# Altium PCB 智能家居-窗帘-电力板.PcbDoc
Units mm, origin at the board's own origin, x right, y up, seen from the top; angles counter-clockwise.
Board outline 65 x 65 mm, 2 copper layers (Top Layer, Bottom Layer); 22 components, 15 nets, 62 pads, 0 vias.
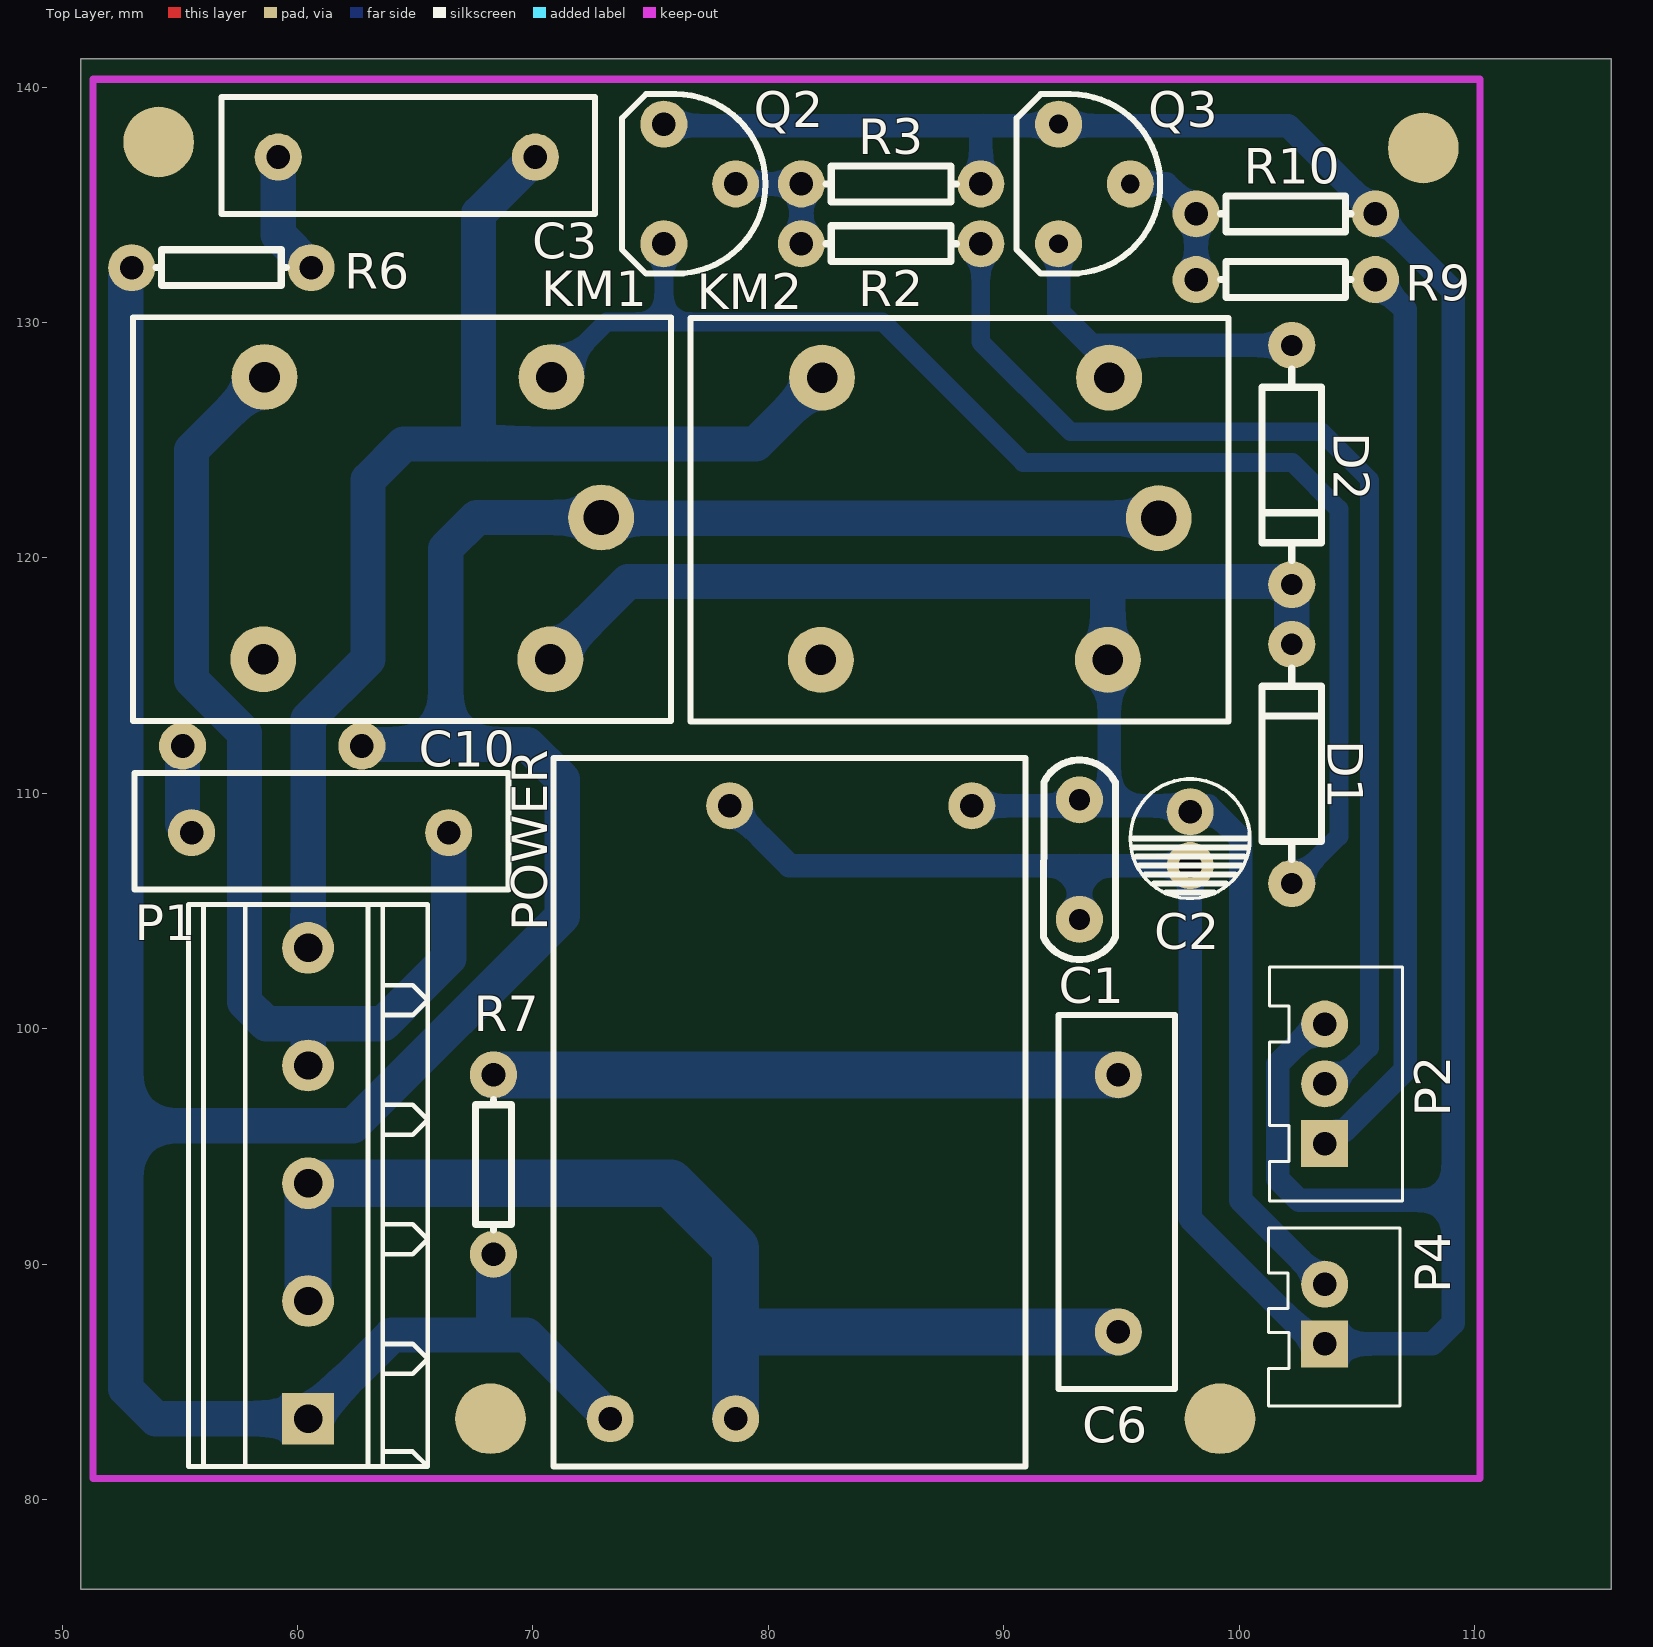
[diagram p0: Top Layer view]
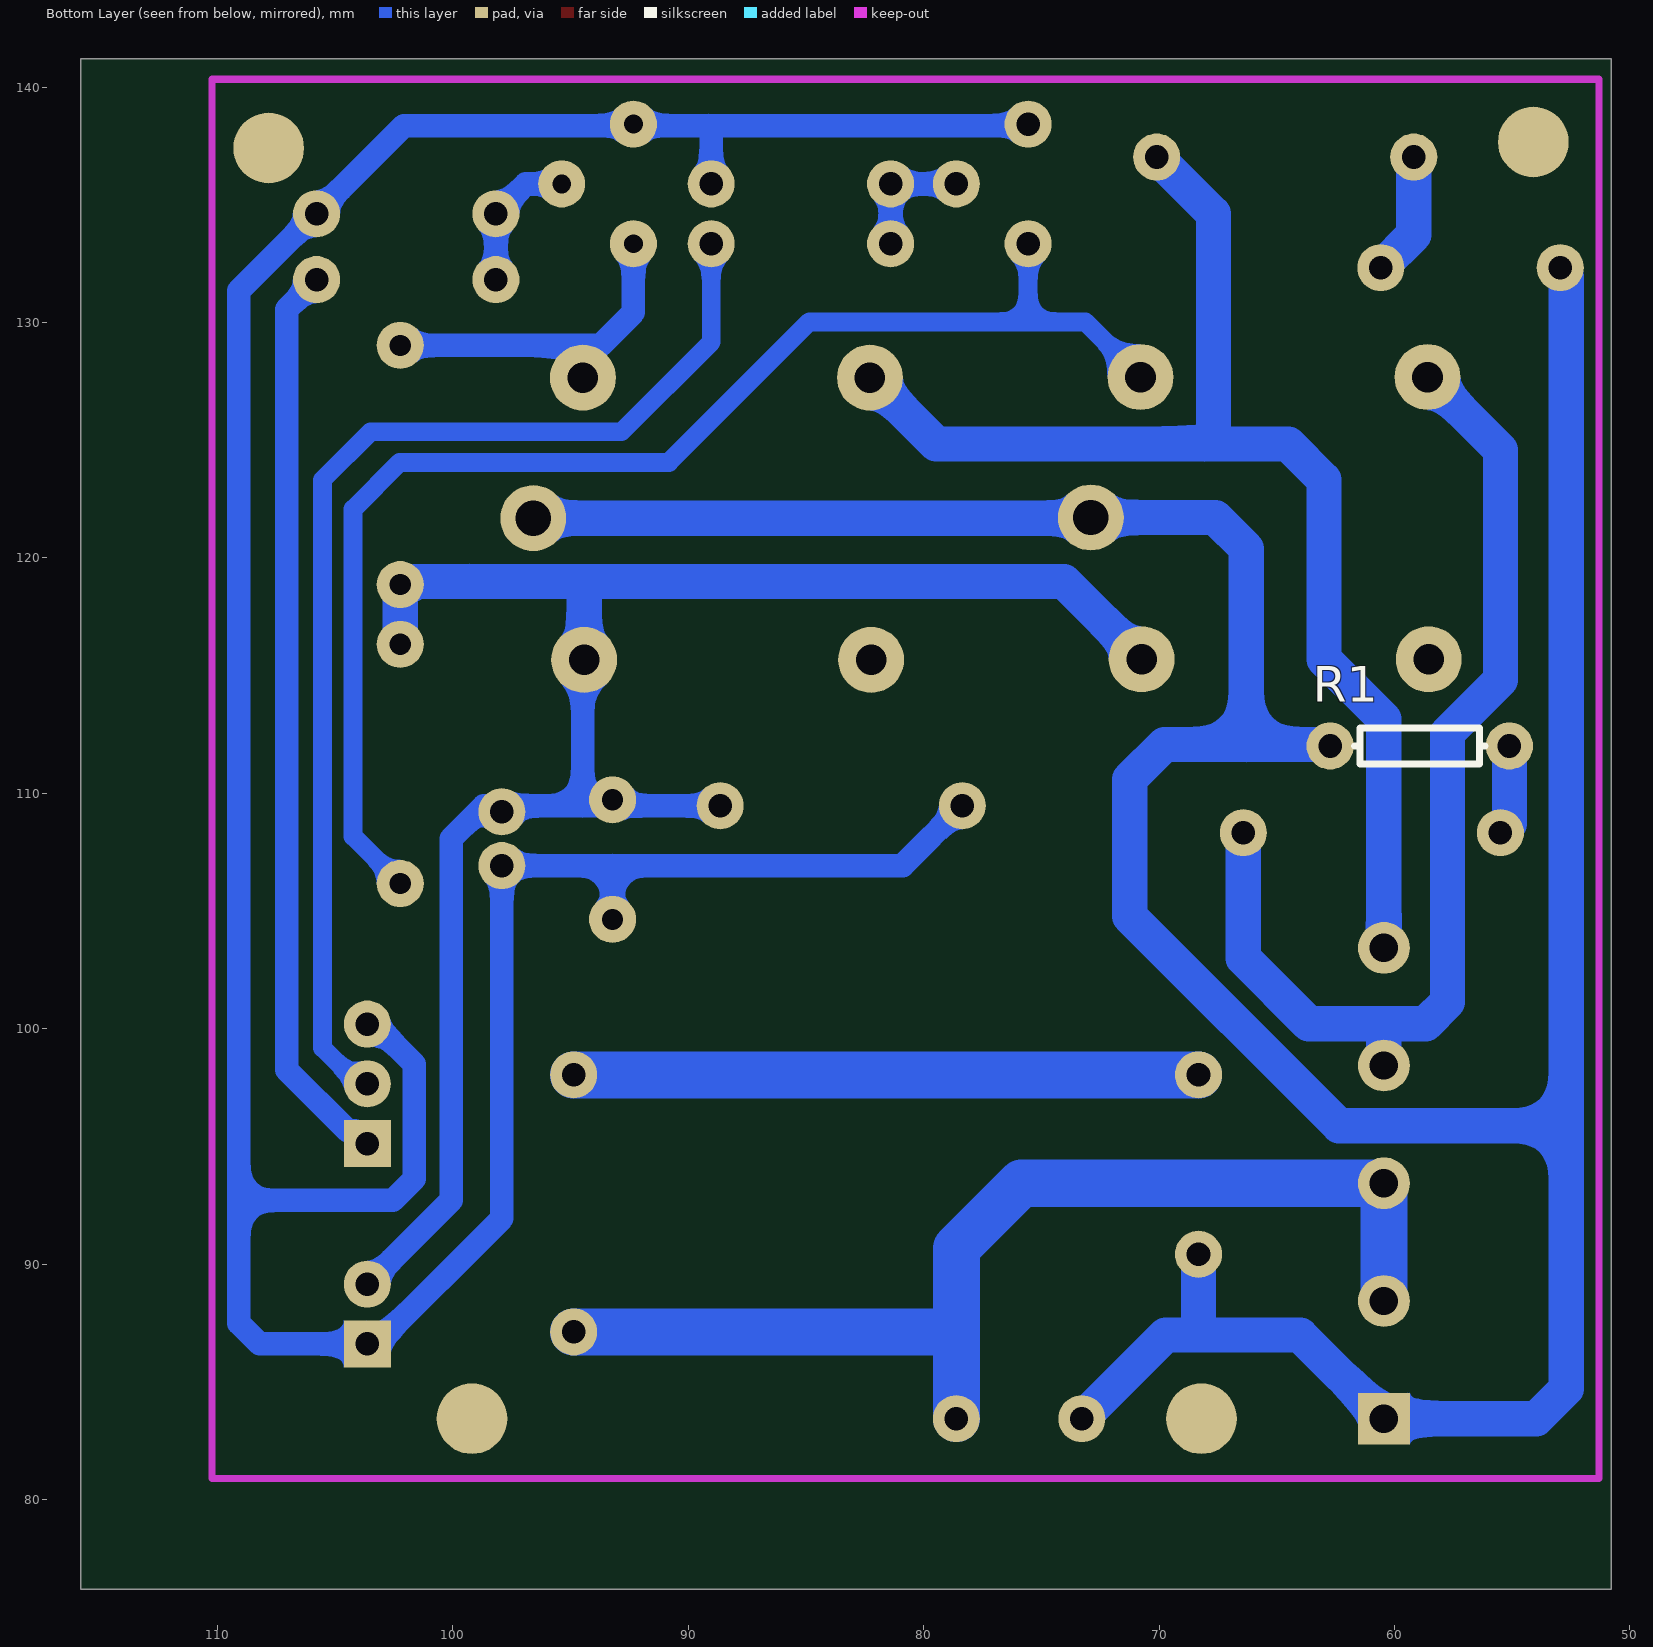
[diagram p1: Bottom Layer view, seen from below]

## Layer stack, top to bottom
Top Solder: solder mask 0.0102, Solder Resist, Dk 3.5
Top Layer: signal copper 0.0356
Dielectric 1: dielectric 0.32, FR-4, Dk 4.8
Bottom Layer: signal copper 0.0356
Bottom Solder: solder mask 0.0102, Solder Resist, Dk 3.5

## Board outline
50.8,76.2 115.8,76.2 115.8,141.2 50.8,141.2

## Design rules (kind name [scope] priority, off if disabled: settings)
Clearance [All] p1: gap=0.5 ignorepadtopadclearanceinfootprint=FALSE except(0: Arc-Hole Track-Hole SMDPad-Hole THPad-Hole Via-Hole Fill-Hole Poly-Hole Region-Hole Text-Hole)
PolygonConnect [All] p1: connectstyle=Relief reliefconductorwidth=0.254 reliefentries=4 polygonreliefangle="90 Angle" airgapwidth=0.254
RoutingVias [All] p1: holewidth=1 width=2 viastyle="Through Hole" minholewidth=0.711 minwidth=1.27 maxholewidth=0.711 maxwidth=1.27
SolderMaskExpansion [All] p1: expansion=0.102
Width [All] p1: maxlimit=5 minlimit=0.5 preferedwidth=0.5 minimp=50.000000 maximp=50.000000 favimp=50.000000
30 further rules are at their usual default settings.

## Components (designator, comment, footprint, x,y, rotation, side; value= is the part's Value field where it differs from the comment)
C1 "0.01uF" 0.1UF 93.218,107.188 r270 top
C2 "Cap Pol1" CD5 97.917,109.22 r0 top value=47uF
C3 "Cap" 0.1UF/275V 70.104,137.033 r180 top value=104
C6 "Cap" 0.1UF/275V 94.869,98.044 r270 top value=104
C10 "Cap" 0.1UF/275V 66.421,108.331 r180 top value=104
D1 "Diode" DIODE 102.235,106.172 r90 top
D2 "Diode" DIODE 102.235,129.032 r270 top
KM1 "12VDC" SRD_RELAY 65.722,121.691 r180 top
KM2 "12VDC" SRD_RELAY 89.408,121.666 r180 top
P1 "电源端口" JK128-500-5P 60.452,83.439 r180 top
P2 "Header 3" TJC3-3A 103.632,97.667 r270 top
P4 "控制板电源端口" TJC3-2A 103.632,86.614 r90 top
POWER "220/5开关电源" 220/5开关电源 73.279,83.439 r90 top
Q2 "8050" TO-92D#1 75.565,135.89 r270 top
Q3 "8050" TO-92D#2 92.329,135.89 r270 top
R1 "100" AXIAL0.3 58.928,112.014 r0 bottom value=1K
R2 "4.7K" AXIAL0.3 85.217,133.35 r180 top value=1K
R3 "4.7K" AXIAL0.3 85.217,135.89 r0 top value=1K
R6 "100" AXIAL0.3 56.769,132.334 r180 top value=1K
R7 "100" AXIAL0.3 68.326,94.234 r90 top value=1K
R9 "4.7K" AXIAL0.3 101.981,131.826 r180 top value=1K
R10 "4.7K" AXIAL0.3 101.981,134.62 r0 top value=1K

## Footprints (in the part's own frame and the unit in brackets; to place one, negate y for a bottom-side part, rotate by r counter-clockwise, add the part's x,y. Pads: shape width x height; smd on the part's side, far side on the other; paste and mask are expansions set on the pad)
0.1UF [mm]
  round 2 hole 0.9: 1(-2.54,0) 2(2.54,0)
  silkscreen extent -4.22,-1.52 4.25,1.53
0.1UF/275V [mm]
  round 2 hole 1: 1(0,0) 2(10.922,0)
  silkscreen extent -2.54,-2.54 13.33,2.41
220/5开关电源 [mm]
  round 2 hole 1: 1(0,0) 2(0,-5.334) 3(26.035,-5.08) 4(26.035,-15.367)
  silkscreen extent -2.03,-17.65 28.07,2.41
AXIAL0.3 [mm]
  round 2 hole 1: 1(-3.81,0) 2(3.81,0)
  silkscreen extent -2.77,-0.76 2.77,0.76
CD5 [mm]
  round 2 hole 1: 1(0,0) 2(0,-2.286)
  silkscreen extent -2.54,-3.68 2.54,1.39
DIODE [mm]
  round 2 hole 0.9: 1(0,0) 2(10.16,0)
  silkscreen extent 1.02,-1.27 9.14,1.27
JK128-500-5P [mm]
  rect 2.2x2.2 hole 1.2: 1(0,0)
  round 2.2 hole 1.2: 2(0,-5) 3(0,-10) 4(0,-15) 5(0,-20)
  silkscreen extent -5.08,-21.84 5.08,2.03
SRD_RELAY [mm]
  round 2.8 hole 1.3: 1(-5.017,5.994) 2(7.175,5.994) 3(7.125,-5.994) 4(-5.067,-5.994)
  round 2.8 hole 1.5: 5(-7.175,-0.025)
  silkscreen extent -10.15,-8.53 12.71,8.61
TJC3-2A [mm]
  rect 2x2 hole 1: 1(0,0)
  round 2 hole 1: 2(2.54,0)
  silkscreen extent -2.64,-3.2 4.93,2.39
TJC3-3A [mm]
  rect 2x2 hole 1: 1(2.544,0)
  round 2 hole 1: 2(0.004,0) 3(-2.536,0)
  silkscreen extent -4.97,-2.35 4.97,3.3
TO-92D#1 [mm]
  round 2 hole 1: 1(-2.54,0) 2(0,3.048) 3(2.54,0)
  silkscreen extent -3.81,-1.78 3.81,4.32
TO-92D#2 [mm]
  round 2 hole 0.8: 1(-2.54,0) 2(0,3.048) 3(2.54,0)
  silkscreen extent -3.81,-1.78 3.81,4.32

## Part data
C1: library part Cap, "Capacitor", LatestRevisionDate=17-Jul-2002, LatestRevisionNote="Re-released for DXP Platform.", PackageDescription="Radial Cap, Thru-Hole; 2 Leads; 0.3 in Pin Spacing", PackageReference=0.1UF, Published=8-Jun-2000, Publisher="Altium Limited"
C2: "Polarized Capacitor (Radial)", LatestRevisionDate=17-Jul-2002, LatestRevisionNote="Re-released for DXP Platform.", PackageDescription="Polarized Capacitor (Radial); 2 Leads", PackageReference=RB7.6-15, Published=8-Jun-2000, Publisher="Altium Limited"
C3 C6 C10: "Capacitor", LatestRevisionDate=17-Jul-2002, LatestRevisionNote="Re-released for DXP Platform.", PackageDescription="Radial Cap, Thru-Hole; 2 Leads; 0.3 in Pin Spacing", PackageReference=RAD-0.3, Published=8-Jun-2000, Publisher="Altium Limited"
D1 D2: "Default Diode", Code_JEDEC=DO-214-AB, LatestRevisionDate=17-Jul-2002, LatestRevisionNote="Re-released for DXP Platform.", PackageDescription="DO-214-AB/SMC; 2 C-Bend Leads; Body 7.9 x 5.9 mm, inc. leads (LxW)", PackageReference=SMC, PackageVersion=Sep-1996, Published=8-Jun-2000, Publisher="Altium Limited"
KM1 KM2: library part SRD-12VDC
P1: library part "Header 5", "Header, 5-Pin", LatestRevisionDate=17-Jul-2002, LatestRevisionNote="Re-released for DXP Platform.", Publisher="Altium Limited"
P2: "Header, 3-Pin", LatestRevisionDate=17-Jul-2002, LatestRevisionNote="Re-released for DXP Platform.", Publisher="Altium Limited"
P4: library part "Header 2", "Header, 2-Pin", LatestRevisionDate=17-Jul-2002, LatestRevisionNote="Re-released for DXP Platform.", Publisher="Altium Limited"
Q2 Q3: library part NPN, "NPN Bipolar Transistor", Code_JEDEC=TO-226-AA, LatestRevisionDate=17-Jul-2002, LatestRevisionNote="Re-released for DXP Platform.", PackageDescription="TO, Flat Index; 3 In-Line, Axial Leads; Body Dia. 4.8mm; Leads 0.55 x 0.51 mm (max)", PackageReference=TO-226-AA, Published=8-Jun-2000, Publisher="Altium Limited"
R1 R2 R3 R6 R7 R9 R10: library part Res1, "Resistor", Published=8-Jun-2000, Publisher="Altium Limited", Revision="July-2002: Re-released for DXP Platform."

## Free pads (board coordinates)
  round 3 all layers, no hole: 2(68.199,83.439) 3(54.102,137.668) 3(99.187,83.439) 3(107.823,137.414)

## Nets (pads, with @x,y where several pads share a name; then routed paths per layer and width w, separated by ;. In a path a pad name is that pad's centre, name@x,y a point inside that pad or via, vN(x,y) a via of type N, cw(c..) or ccw(c..) an arc to the next point about the centre after c; other vN are vias at no path point)
GND: C1.2 C2.2 P2.3 P4.1 POWER.3 Q2.1 Q3.1 R3.2 R10.2 | length 149.9
  Bottom Layer w1: Q2.1@75.565,138.37 89.154,138.37 ; POWER.3 80.899,106.934 93.218,106.934 ; R3.2 89.027,138.243 89.154,138.37 ; C1.2 93.218,106.934 ; P2.3 103.092,99.663 102.804,99.663 101.632,98.491 101.632,93.629 102.551,92.71 109.086,92.71 ; 89.154,138.37 102.075,138.37 109.086,131.359 109.086,92.71 ; 93.218,106.934 C2.2 97.917,91.948 103.251,86.614 P4.1 108.204,86.614 109.086,87.496 109.086,92.71
L: KM1.5 KM2.5 P1.1 POWER.1 R1.2 R6.2 R7.1 | length 150.8
  Bottom Layer w1.5: R6.2@52.708,131.953 52.708,95.885 ; R1.2@63.119,112.014 63.119,112.081 66.294,112.081 ; R7.1 68.326,87.249 68.072,86.995 ; POWER.1 69.723,86.995 68.072,86.995 ; KM2.5 72.923,121.691 KM1.5 67.615,121.717 66.294,120.396 66.294,112.081 ; 52.708,95.885 62.357,95.885 71.247,104.775 71.247,110.607 69.773,112.081 66.294,112.081 ; 52.708,95.885 52.708,84.706 53.975,83.439 P1.1 64.008,86.995 68.072,86.995
L_OUT1: C10.1 KM1.3 P1.4 | length 46.2
  Bottom Layer w1.5: KM1.3 55.499,124.587 55.499,114.815 57.749,112.565 57.749,101.142 58.674,100.217 60.706,100.217 ; P1.4 60.452,99.963 60.706,100.217 ; C10.1 66.421,102.997 63.641,100.217 60.706,100.217
L_OUT2: C3.1 KM2.3 P1.5 | length 55.4
  Bottom Layer w1.5: P1.5 60.452,113.157 62.992,115.697 62.992,123.317 64.516,124.841 68.072,124.841 ; C3.1 67.691,134.62 67.691,125.222 68.072,124.841 ; KM2.3 79.464,124.841 68.072,124.841
N: C6.2 P1.2 P1.3 POWER.2 | length 47.9
  Bottom Layer w2: P1.2 P1.3 75.852,93.439 78.613,90.678 78.613,86.868 ; POWER.2 78.613,86.868 ; C6.2 78.867,87.122 78.613,86.868
NetC3_2: C3.2 R6.1 | length 5.3
  Bottom Layer w1.5: C3.2 59.182,133.731 R6.1
NetC6_1: C6.1 R7.2 | length 26.5
  Bottom Layer w2: R7.2 C6.1
NetC10_2: C10.2 R1.1 | length 3.8
  Bottom Layer w1.5: R1.1 55.118,108.712 C10.2
NetD1_1: D1.1 KM1.4 Q2.3 | length 57.8
  Bottom Layer w0.8: KM1.4 73.135,130.031 75.565,130.031 ; Q2.3 75.565,130.031 ; D1.1 104.237,108.174 104.237,122.077 102.254,124.06 90.824,124.06 84.853,130.031 75.565,130.031
NetD2_1: D2.1 KM2.4 Q3.3 | length 14.8
  Bottom Layer w1: Q3.3 92.329,130.429 93.726,129.032 D2.1 ; KM2.4 KM2.4@94.475,129.019
NetP2_1: P2.1 R9.1 | length 38.8
  Bottom Layer w1: P2.1 104.172,95.663 104.46,95.663 107.061,98.264 107.061,130.556 R9.1
NetP2_2: P2.2 R2.1 | length 49.4
  Bottom Layer w0.8: R2.1 89.027,129.17 92.837,125.36 103.494,125.36 105.537,123.317 105.537,99.187 P2.2@104.013,97.663
NetQ2_2: Q2.2 R2.2 R3.1 | length 5.3
  Bottom Layer w1: Q2.2 R3.1 R2.2
NetQ3_2: Q3.2 R9.2 R10.1 | length 6.1
  Bottom Layer w1: Q3.2 96.901,135.89 R10.1 R9.2
VCC-12: C1.1 C2.1 D1.2 D2.2 KM1.1 KM2.1 P4.2 POWER.4 | length 77.4
  Bottom Layer w1: POWER.4 94.488,109.474 ; KM2.1 94.488,115.608 94.488,109.474 ; C2.1 C2.1@97.663,109.474 ; P4.2 100.076,92.71 100.076,108.077 98.679,109.474 C2.1@97.663,109.474 ; 94.488,109.474 C2.1@97.663,109.474
  Bottom Layer w1.5: KM1.1 74.041,118.999 94.869,118.999 ; KM2.1 94.424,118.554 94.869,118.999 ; D2.2@101.727,118.872 101.6,118.999 94.869,118.999 ; D1.2 D2.2
pads on no net: KM1.2 KM2.2

## Keep-outs
Keep-Out Layer:
  lines w0.3: 51.308,80.899 110.236,80.899 110.236,140.335 51.308,140.335 51.308,80.899

## Silkscreen, mask and mechanical layers (free items; w line width, h text height)
Drill Drawing:
  text ".LEGEND" at 120.88,81.28 h1.52
  text "Drill Drawing." at 120.88,78.74 h1.52

## Dimensions
51.308,80.899 to 110.236,80.899 on Mechanical 1
51.308,80.899 to 51.308,140.335 on Mechanical 1